# Altium PCB PC110-itx.PcbDoc (part 8 of 16)
Units mm, origin at the board's own origin, x right, y up, seen from the top; angles counter-clockwise.
Board outline 170 x 170 mm, 16 copper layers (FC1, FC2, FC3, FC4, IP1, IC1, IC2, IP2, IP3, IC3, IC4, IP4, BC4, BC3, BC2, BC1), stack 3.903 mm thick; 935 components, 1357 nets, 4698 pads, 3240 vias.
Unrouted connection lines stored in the file: 552.
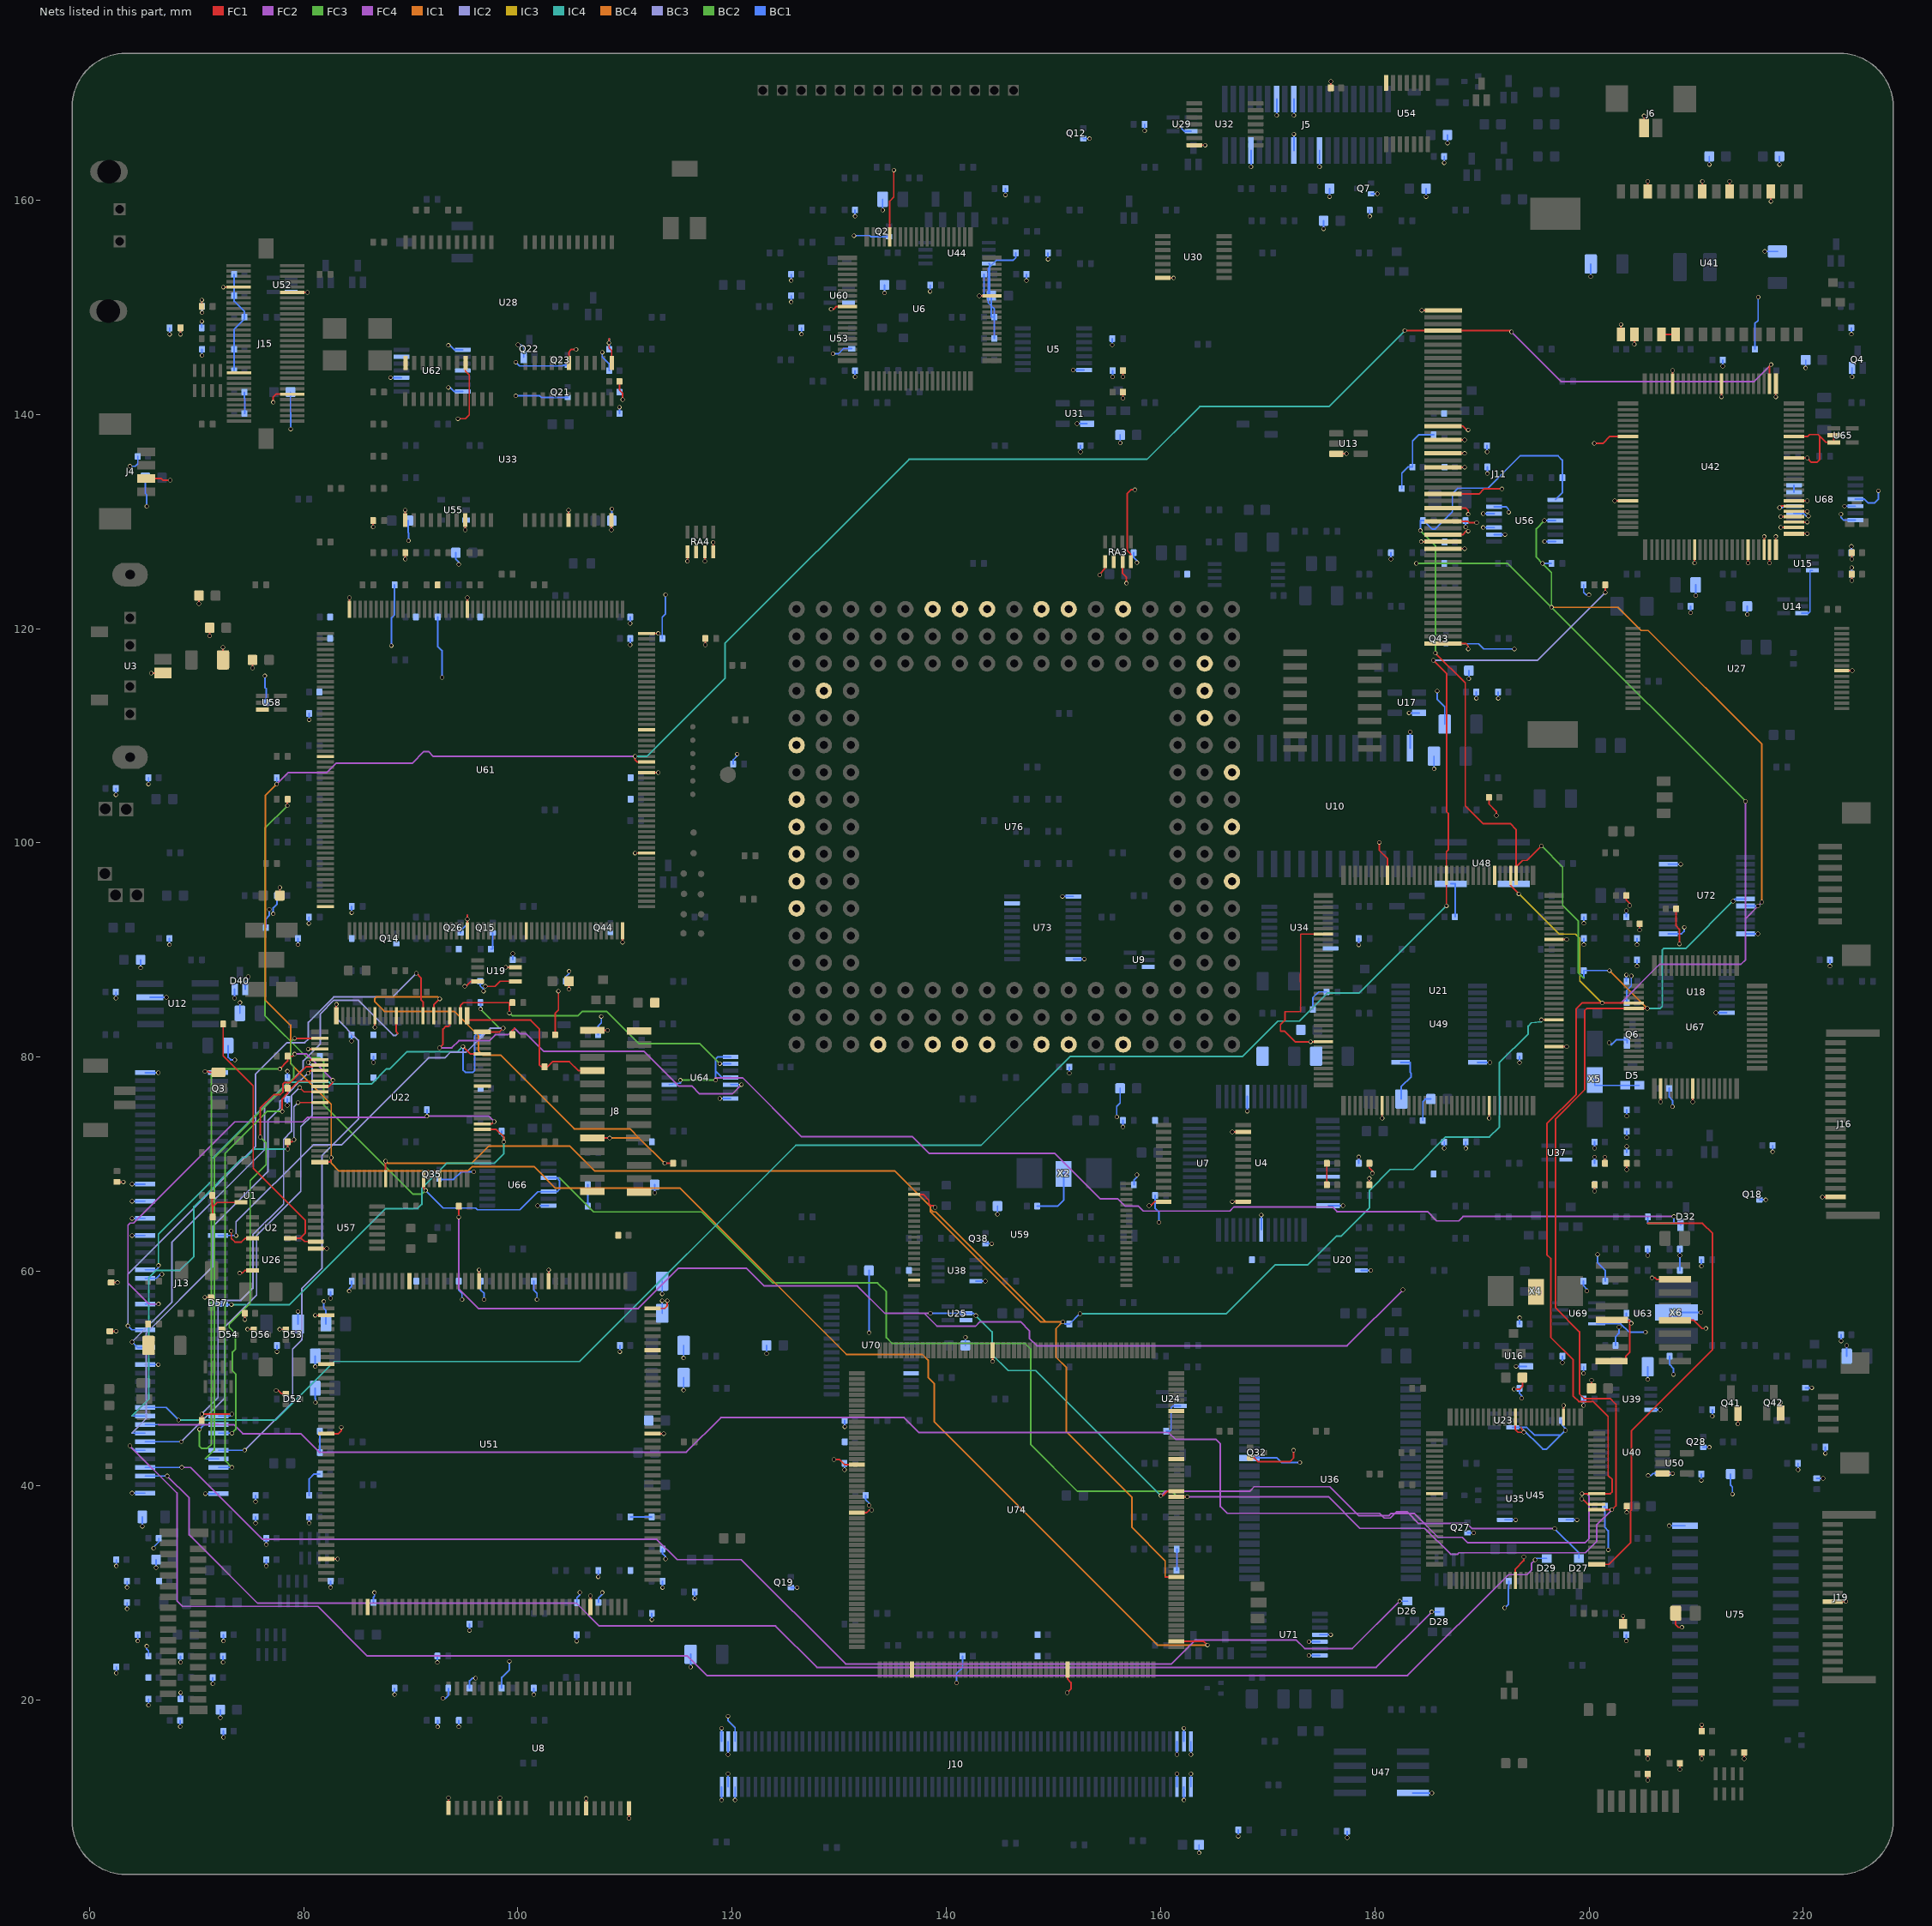
[diagram p21: the nets of this part, all layers, seen from the top]

## Via types
v1: diameter 0.4, hole 0.3, FC1 to BC1, 3240 vias

## Nets (pads, with @x,y where several pads share a name; then routed paths per layer and width w, separated by ;. In a path a pad name is that pad's centre, name@x,y a point inside that pad or via, vN(x,y) a via of type N, cw(c..) or ccw(c..) an arc to the next point about the centre after c; other vN are vias at no path point) (continued)
FDC_PE: J13.78 R138.1 U22.58 | length 50.7
  FC1 w0.15: U22.58@96.7,73.76 97.56,73.76 v1(97.79,73.99)
  FC2 w0.15: v1@91.417,74.397 v1(91.51,74.49) 97.29,74.49 v1(97.79,73.99)
  FC4 w0.15: v1(66.446,56.952) 65.577,56.952 63.602,58.928 63.602,64.313 63.805,64.516 64.11,64.516 73.558,73.965 79.934,73.965 80.366,74.397 v1@91.417,74.397
  BC1 w0.15: J13.78@65.207,56.952 v1(66.446,56.952) ; v1(91.51,74.49) R138.1@91.51,75.09
FDC_RDATA#: J13.91 R307.2 U22.14 | length 42.4
  FC1 w0.15: v1(78.51,71.425) R307.2@78.51,72.09 78.892,72.09 v1(79.095,72.293) ; v1(79.477,75.76) U22.14@81.5,75.76
  IC4 w0.15: 63.967,46.503 63.962,46.507 65.532,48.077 65.532,59.385 66.243,60.096 68.453,60.096 69.748,61.392 69.748,66.045 74.341,70.637 74.625,70.637 75.413,71.425 v1(78.51,71.425)
  BC3 w0.15: v1(79.095,72.293) 79.095,75.378 v1(79.477,75.76)
  BC1 w0.15: 63.967,46.503 J13.91@65.207,46.503
FDC_RI1#: J8.5 R190.1 U22.82 | length 47.7
  FC1 w0.15: U22.82@92.15,83.86 92.15,84.886 v1(92.71,85.446) ; J8.5@106.95,72.45 v1(108.576,72.45) ; v1(113.716,70.09) R190.1@114.49,70.09
  BC4 w0.15: v1(92.71,85.446) 92.532,85.623 86.766,85.623 86.64,85.497 86.64,85.166 87.528,84.277 94.068,84.277 96.317,82.028 96.317,80.594 96.723,80.188 98.374,80.188 105.258,73.304 110.479,73.304 111.333,72.45 ; v1(108.576,72.45) 111.333,72.45 ; v1(113.716,70.09) 113.704,70.079 111.333,72.45
FDC_RI2#: J13.81 R311.1 U22.84 | length 54.3
  FC1 w0.15: v1(90.526,87.833) 90.958,87.401 90.958,85.358 91.15,85.166 U22.84@91.15,83.86
  BC3 w0.15: v1(63.602,54.915) 63.602,59.766 75.514,71.679 75.514,78.435 78.435,81.356 80.112,81.356 80.442,81.686 80.442,83.261 82.804,85.623 88.316,85.623 v1(90.526,87.833)
  BC1 w0.15: v1(63.602,54.915) 63.964,54.552 J13.81@65.207,54.552
FDC_RTS1#: R193.1 U22.79 U64.5 | length 37.1
  FC1 w0.15: v1(92.685,80.874) 93.015,81.204 93.015,82.626 93.269,82.88 93.523,82.88 93.65,83.007 U22.79@93.65,83.86 ; R193.1@99.49,82.09 99.49,82.497 99.688,82.695
  FC2 w0.15: v1(92.685,80.874) 93.832,80.874 94.493,81.534 97.333,81.534 97.892,82.093 99.085,82.093 99.688,82.695 100.189,82.194 100.762,82.194 102.413,80.543 111.785,80.543 115.011,77.318 116.23,77.318 116.967,76.581 120.02,76.581 v1(120.879,77.44)
  BC1 w0.15: U64.5@119.862,77.44 v1(120.879,77.44)
FDC_RTS2#: J13.83 U22.89 | length 50.2
  FC1 w0.15: U22.89@88.65,83.86 88.65,82.368 88.773,82.245 88.773,82.194
  BC3 w0.15: v1(63.983,53.411) 67.691,57.119 67.691,62.71 76.352,71.371 76.352,75.336 79.959,78.943 79.959,79.654 81.559,81.255 81.559,84.049 82.829,85.319 85.09,85.319 88.367,82.042 88.621,82.042 88.773,82.194
  BC1 w0.15: v1(63.983,53.411) 64.491,52.903 J13.83@65.207,52.903
FDC_RXD1: J8.10 R194.1 U22.76 | length 16.4
  FC1 w0.15: U22.76@95.25,83.86 95.25,83.464 101.194,83.464 102.006,82.652 102.006,79.293 102.21,79.09 R194.1@102.49,79.09 102.737,79.09 103.226,79.578 104.81,79.578 105.639,78.75 J8.10@106.95,78.75
FDC_SLCT: J13.23 R140.2 U22.57 | length 38.3
  FC1 w0.15: U22.57@96.7,73.26 97.976,73.26 98.693,72.542 v1(98.693,72.084)
  IC4 w0.15: v1(73.254,56.903) 78.696,56.903 87.655,65.862 90.627,65.862 91.034,66.269 91.034,67.742 93.396,70.104 97.815,70.104 98.693,70.982 v1(98.693,72.084)
  BC1 w0.15: J13.23@72.008,56.903 v1(73.254,56.903) ; R140.2@98.49,73.09 98.49,72.693 98.693,72.49 v1(98.693,72.084)
FDC_SLCTIN#: J13.74 R132.1 U22.71 | length 50.9
  FC1 w0.15: v1(94.869,81.001) 95.56,80.31 U22.71@96.7,80.31
  IC4 w0.15: v1(66.446,60.554) 66.446,63.477 71.409,68.44 71.409,70.495 78.588,77.673 82.373,77.673 82.55,77.496 86.335,77.496 87.756,78.917 88.063,78.917 89.639,80.493 94.361,80.493 v1(94.869,81.001)
  BC1 w0.15: J13.74@65.207,60.152 66.243,60.152 66.446,60.356 v1(66.446,60.554) ; v1(94.869,81.001) 94.869,78.816 95.098,78.588 95.809,78.588 95.961,78.74 95.961,81.988 96.063,82.09 R132.1@96.51,82.09
FDC_STEP#: J13.94 U22.6 | length 45.2
  FC1 w0.15: v1(80.416,79.502) 80.674,79.76 U22.6@81.5,79.76
  BC3 w0.15: v1(68.58,44.102) 72.619,48.141 72.619,54.795 75.616,57.792 75.616,63.354 79.731,67.469 79.731,73.508 80.797,74.574 80.797,79.121 v1(80.416,79.502)
  BC1 w0.15: J13.94@65.207,44.102 v1(68.58,44.102)
FDC_STROBE#: J13.31 R137.1 U22.75 | length 40.9
  FC1 w0.15: U22.75@96.7,82.36 98.286,82.36 v1(98.628,82.702)
  IC2 w0.15: v1(73.69,63.352) 73.69,64.618 80.891,71.818 83.553,71.818 91.669,79.934 93.167,79.934 93.701,80.467 95.174,80.467 97.409,82.702 v1(98.628,82.702)
  BC2 w0.15: v1(96.51,84.49) 98.298,82.702 v1(98.628,82.702)
  BC1 w0.15: J13.31@72.008,63.352 v1(73.69,63.352) ; v1(96.51,84.49) R137.1@96.51,85.09
FDC_TRK0#: J13.9 R124.2 U22.11 | length 54.4
  FC1 w0.15: v1(77.775,78.892) 78.51,79.628 R124.2@78.51,80.09 78.969,80.09 v1(79.172,80.293) ; U22.11@81.5,77.26 82.34,77.26 82.728,77.648 v1(82.728,77.851)
  FC2 w0.15: v1(79.172,80.293) 80.286,80.293 v1(82.728,77.851)
  FC3 w0.15: v1(70.282,45.263) 70.282,43.663 70.46,43.485 71.018,43.485 71.399,43.866 71.399,78.334 71.958,78.892 v1(77.775,78.892)
  BC1 w0.15: v1(70.282,45.263) 70.722,45.703 J13.9@72.058,45.703
FDC_TXD1: R188.1 U22.77 U64.2 | length 29.8
  FC1 w0.15: U22.77@94.65,83.86 94.65,84.846 94.894,85.09 99.212,85.09 ; v1(99.212,84.125) 99.212,85.09 ; R188.1@99.49,85.09 99.212,85.09
  BC2 w0.15: v1(99.212,84.125) 99.466,83.871 105.613,83.871 106.02,84.277 108.28,84.277 111.303,81.255 116.992,81.255 v1(118.847,79.4)
  BC1 w0.15: v1(118.847,79.4) 118.847,79.39 U64.2@119.862,79.39
FDC_TXD2_EN: R8.1 U2.5 U57.6 | length 25.9
  FC1 w0.15: R8.1@72.49,83.09 72.49,80.113 75.286,77.318 75.286,69.647 80.162,64.77 80.162,63.598 79.654,63.09 ; U2.5@78.75,63.09 79.654,63.09 ; U57.6@81.138,62.79 80.081,62.79 79.781,63.09 79.654,63.09
FDC_UART1_EN: D32.1 R180.2 U35.76 U64.1 U64.4 U64.10 | length 152.3
  FC1 w0.15: U35.76@200.72,32.65 201.849,32.65 203.87,34.671 203.87,37.409 203.875,37.414 203.875,37.632 203.962,37.719 203.962,45.136 211.531,52.705 211.531,63.551 210.591,64.491 205.49,64.491
  FC2 w0.15: v1(118.466,77.851) 118.466,78.08 120.98,78.08 126.492,72.568 136.855,72.568 138.405,71.018 150.139,71.018 154.383,66.775 156.008,66.775 156.692,66.091 157.937,66.091 158.394,65.634 166.454,65.634 166.851,66.031 176.022,66.031 176.472,65.582 184.913,65.582 185.775,64.72 187.832,64.72 188.238,65.126 v1(207.915,65.126)
  BC2 w0.15: v1(115.164,77.851) v1(118.466,77.851)
  BC1 w0.15: U64.10@114.137,77.44 115.164,77.592 v1(115.164,77.851) ; v1(118.466,77.851) 118.466,78.7 ; U64.4@119.862,78.09 119.075,78.09 118.466,78.7 ; U64.1@119.862,80.04 118.669,80.04 118.466,79.837 118.466,78.7 ; R180.2@205.49,65.09 205.49,64.491 207.915,64.491 ; v1(207.915,65.126) 207.915,64.491 ; D32.1@208.55,64.34 208.55,64.491 207.915,64.491
FDC_WDATA#: J13.8 U22.7 | length 41.6
  FC1 w0.15: v1(75.946,72.542) 75.946,75.235 77.216,76.505 77.826,76.505 78.08,76.759 78.08,77.521 78.181,77.622 78.74,77.622 80.213,79.096 80.848,79.096 80.848,79.26 U22.7@81.5,79.26
  FC3 w0.15: v1(73.304,44.902) 73.66,45.258 73.66,50.419 73.356,50.723 73.356,52.477 73.635,52.756 73.635,54.204 73.05,54.788 73.05,55.068 75.006,57.024 75.006,68.478 76.493,69.965 76.493,71.995 v1(75.946,72.542)
  BC1 w0.15: J13.8@72.058,44.902 v1(73.304,44.902)
FDC_WGATE#: J13.93 U22.8 | length 42.9
  FC1 w0.15: v1(80.416,78.511) 80.665,78.76 U22.8@81.5,78.76
  BC3 w0.15: 63.967,44.902 63.962,44.907 65.303,46.249 65.303,54.229 71.501,60.427 71.501,64.16 76.657,69.317 76.657,74.092 77.798,75.233 77.798,75.893 v1(80.416,78.511)
  BC1 w0.15: 63.967,44.902 J13.93@65.207,44.902
FDC_WRTPRT#: J13.10 R125.1 U22.12 | length 42.6
  FC1 w0.15: v1(70.49,46.69) R125.1@70.49,46.09 70.495,46.685 v1(73.304,46.685) ; v1(79.628,77.166) 80.035,76.76 U22.12@81.5,76.76
  BC3 w0.15: v1@70.495,46.685 v1(70.49,46.69) 72.009,48.209 72.009,56.896 72.415,57.302 74.143,57.302 75.26,58.42 75.26,63.424 78.13,66.294 78.13,72.335 78.865,73.07 78.865,76.403 v1(79.628,77.166)
  BC1 w0.15: J13.10@72.058,46.503 73.122,46.503 v1(73.304,46.685)
FDD_Bowman: J13.90 R144.2 U21.125 | length 184.8
  FC1 w0.15: v1(185.471,117.043) 186.69,115.824 186.69,102.921 186.868,102.743 186.868,99.373 186.682,99.187 U21.125@186.682,96.966 186.682,94.14 v1(186.69,94.132) ; R144.2@201.51,124.09 201.51,123.407 v1(201.524,123.393)
  IC2 w0.15: v1(185.471,117.043) 195.174,117.043 v1(201.524,123.393)
  IC4 w0.15: v1(68.326,46.126) 77.394,46.126 82.855,51.587 105.766,51.587 125.959,71.78 143.256,71.78 151.536,80.061 167.64,80.061 170.943,83.364 172.949,83.364 175.565,85.979 178.537,85.979 v1(186.69,94.132)
  BC1 w0.15: J13.90@65.207,47.303 67.15,47.303 v1(68.326,46.126)
FDD_DRSEL: J13.5 U22.2 | length 46.5
  FC1 w0.15: v1(79.146,81.76) U22.2@81.5,81.76
  FC3 w0.15: 70.823,42.502 71.653,43.332 71.653,70.612 79.07,78.029 79.07,79.146 78.816,79.4 78.816,81.43 v1(79.146,81.76)
  BC1 w0.15: 70.823,42.502 J13.5@72.058,42.502
FDD_INDEX#: J13.4 R123.2 U22.10 | length 43.4
  FC1 w0.15: v1(78.003,74.93) 78.003,76.124 78.51,76.63 R123.2@78.51,77.09 78.847,77.09 79.517,77.76 U22.10@81.5,77.76
  FC3 w0.15: v1(73.304,41.702) 72.68,42.327 72.68,71.029 76.581,74.93 v1(78.003,74.93)
  BC1 w0.15: J13.4@72.058,41.702 v1(73.304,41.702)
FDD_MOTEN: J13.6 U22.100 | length 50.4
  FC1 w0.15: U22.100@83.05,83.86 83.05,84.93 v1(83.058,84.938)
  BC3 w0.15: v1(74.498,43.302) 78.969,47.773 78.969,52.73 79.832,53.594 79.832,58.395 81.712,60.275 81.712,70.816 85.115,74.219 85.115,81.585 83.058,83.642 v1(83.058,84.938)
  BC1 w0.15: J13.6@72.058,43.302 v1(74.498,43.302)
FDD_Pluto1: D28.2 J13.98 | length 132.4
  FC4 w0.15: v1(67.259,40.902) 69.317,38.845 69.317,35.408 75.692,29.032 105.461,29.032 107.594,26.899 124.054,26.899 127.914,23.038 180.137,23.038 v1(185.314,28.215)
  BC1 w0.15: J13.98@65.207,40.902 v1(67.259,40.902) ; v1(185.314,28.215) D28.2@186.05,28.215
FDD_Pluto2: D26.2 J13.97 | length 128.5
  FC4 w0.15: v1(68.631,41.702) 69.452,41.702 76.161,34.994 112.961,34.994 114.859,33.096 120.853,33.096 130.598,23.351 161.017,23.351 163.27,25.603 172.644,25.603 173.457,24.79 177.897,24.79 v1(182.321,29.215)
  BC1 w0.15: J13.97@65.207,41.702 v1(68.631,41.702) ; v1(182.321,29.215) D26.2@183.05,29.215
FDD_Pluto3: D29.2 J13.95 | length 153.6
  FC4 w0.15: v1(63.779,43.713) 68.174,39.319 68.174,29.235 68.682,28.727 81.331,28.727 85.954,24.105 115.824,24.105 117.656,22.273 183.055,22.273 192.481,31.699 194.208,31.699 194.615,32.106 194.615,32.723 v1(194.962,33.071)
  BC1 w0.15: v1(63.779,43.713) 64.19,43.302 J13.95@65.207,43.302 ; v1(194.962,33.071) 195.106,33.215 D29.2@196.05,33.215
FDD_Pluto4: D27.2 J13.92 | length 145.9
  FC4 w0.15: 66.438,45.703 66.446,45.695 73.482,45.695 74.32,44.856 79.721,44.856 81.449,43.129 115.722,43.129 118.948,46.355 136.068,46.355 137.465,44.958 160.766,44.958 161.391,44.333 165.141,44.333 165.583,43.891 165.583,38.049 166.218,37.414 180.442,37.414 180.874,36.982 181.431,36.982 181.996,37.548 183.025,37.548 184.099,36.474 188.595,36.474 189.078,35.992 v1(196.789,35.992)
  BC1 w0.15: J13.92@65.207,45.703 66.438,45.703 ; v1(196.789,35.992) 199.05,33.731 D27.2@199.05,33.215
GND: C1.1 C2.2 C3.2 C4.2 C5.2 C6.1 C7.2 C8.2 C9.2 C14.2 C16.2 C17.2 C19.1 C20.1 C22.2 C24.1 C26.2 C27.2 C28.2 C30.1 C31.1 C32.2 C33.2 C34.2 C35.1 C36.1 C37.2 C38.2 C39.2 C40.2 C41.2 C42.1 C43.2 C44.1 C45.2 C47.2 C48.2 C49.1 C50.1 C51.2 C52.2 C53.1 C54.2 C55.1 C56.2 C57.1 C58.1 C59.2 C61.2 C62.1 C63.1 C64.1 C66.1 C68.2 C69.2 C70.1 C71.1 C72.2 C73.1 C74.1 C75.2 C76.2 C77.1 C78.1 C79.2 C80.2 C81.2 C82.2 C83.2 C84.2 C86.2 C87.2 C88.1 C90.1 C91.2 C92.1 C93.2 C94.2 C95.2 C96.1 C97.2 C98.2 C99.1 C100.2 C101.1 C102.1 C103.2 C104.1 C105.2 C106.1 C107.1 C108.1 C109.1 C110.1 C111.2 C112.1 C113.1 C114.1 C115.1 C116.2 C117.1 C118.2 C119.2 C120.2 C121.2 C122.2 C123.2 C124.1 C125.1 C126.2 C127.1 C128.2 C129.2 C131.2 C132.2 C133.2 C134.1 C135.2 C136.2 C139.1 C144.1 C145.1 C148.1 C149.1 C151.2 C152.2 C153.2 C155.1 C156.1 C158.1 C159.1 C160.1 C161.2 C162.2 C163.1 C164.1 C165.2 C166.2 C167.1 C168.1 C169.2 C170.2 C171.2 C172.1 C173.2 C174.2 C175.2 C176.2 C177.1 C178.2 C179.2 C180.2 C181.2 C182.2 C183.2 C184.2 C185.2 C186.2 C187.2 C188.2 C189.1 C190.2 C191.2 C192.2 C193.2 C194.2 C195.1 C196.2 C197.1 C198.2 C199.2 C200.1 C201.2 C202.1 C203.1 C204.1 C205.2 C206.1 C208.1 C210.1 C211.1 C212.2 C215.2 C216.2 C217.2 C218.2 C219.2 C220.1 C221.1 C222.1 C223.1 C224.1 C226.1 C227.1 C228.2 C229.1 C230.1 C231.1 C232.1 C233.2 C234.1 C235.2 C236.2 C237.2 C239.1 C241.1 C242.1 C243.2 C244.1 C245.1 C246.2 C247.2 C249.1 C250.1 C251.1 C252.2 C253.2 C254.1 C255.1 C256.1 C258.1 C259.1 C260.1 C261.2 C262.1 C263.1 C264.1 C265.1 C267.1 C268.1 C269.1 C271.2 C272.2 C273.2 C274.2 C275.2 C276.2 C277.1 C278.1 C279.2 C280.1 C281.1 C282.2 C283.2 D5.1 D5.3 D23.2 D36.2 D40.1 D40.2 D41.2 D47.2 D52.1 D53.1 D54.1 D56.1 D57.1 J4.2 J5.7 J5.9 J5.24 J5.29 J5.32 J6.2 J8.1 J8.13 J8.14 J8.26 J10.1 J10.2 J10.3 J10.68 J10.69 J10.70 J10.71 J10.72 J10.73 J10.138 J10.139 J10.140 J11.1 J11.15 J11.16 J11.17 J11.19 J11.21 J11.23 J11.27 J11.29 J11.31 J11.33 J11.50 J13.1 J13.50 J13.51 J13.64 J13.66 J13.68 J13.70 J13.75 J13.85 J13.100 J15.10 J15.26 J15.36 J15.55 J16.2 J19.9 L2.1 L10.2 Q2.2 Q3.1 Q4.1 Q6.1 Q7.2 Q12.2 Q14.2 Q15.2 Q18.2 Q19.2 Q21.2 Q22.1 Q23.2 Q26.2 Q27.2 Q28.2 Q32.2 Q35.2 Q38.2 Q41.1 Q42.1 Q43.2 Q44.2 R1.1 R2.1 R5.1 R6.1 R7.1 R10.1 R11.2 R13.1 R15.2 R18.2 R19.1 R22.1 R23.2 R29.2 R33.2 R49.2 R57.2 R60.1 R61.1 R63.1 R66.1 R73.1 R77.2 R80.1 R82.2 R83.2 R90.1 R91.2 R98.2 R108.2 R113.1 R126.2 R131.1 R145.1 R147.2 R150.2 R151.1 R153.1 R155.1 R160.1 R184.2 R186.2 R199.1 R202.1 R209.2 R210.2 R211.2 R213.2 R218.1 R219.1 R223.2 R224.2 R230.1 R231.1 R233.2 R247.2 R259.2 R263.2 R264.2 R265.2 R267.2 R269.2 R270.2 R271.1 R273.2 R275.2 R279.2 R280.2 R314.2 R327.2 R379.1 R383.1 R395.1 R402.2 R404.2 R405.2 R406.2 R408.1 R411.1 RA3.5 RA3.6 RA3.7 RA3.8 RA4.5 RA4.6 RA4.7 RA4.8 U1.3 U2.4 U3.2 U4.5 U4.22 U4.26 U4.33 U5.7 U6.16 U6.30 U6.73 U7.12 U7.13 U7.23 U8.21 U8.27 U8.35 U8.40 U9.3 U10.12 U12.7 U13.3 U14.3 U15.3 U16.3 U17.3 U18.7 U19.4 U19.5 U19.7 U20.4 U21.8 U21.28 U21.44 U21.64 U21.80 U21.100 U21.116 U21.136 U22.4 U22.45 U22.65 U22.93 U23.3 U24.3 U25.3 U26.4 U27.24 U28.23 U28.30 U28.39 U28.44 U29.3 U30.7 U31.3 U32.7 U33.23 U33.30 U33.39 U33.44 U34.7 U35.4 U35.13 U35.37 U35.63 U35.87 U36.15 U37.3 U38.4 U39.4 U40.7 U41.3 U41.6 U41.8 U41.12 U41.15 U41.16 U41.18 U41.19 U42.10 U42.20 U42.23 U42.24 U42.25 U42.26 U42.27 U42.28 U42.29 U42.30 U42.31 U42.32 U42.40 U42.44 U42.51 U42.61 U42.70 U42.82 U42.94 U44.4 U45.8 U45.9 U47.4 U48.4 U48.5 U49.12 U49.13 U50.3 U51.12 U51.22 U51.32 U51.42 U51.49 U51.59 U51.77 U51.83 U51.115 U51.142 U51.154 U51.160 U52.3 U53.3 U54.7 U55.3 U56.7 U56.9 U56.10 U56.12 U56.13 U57.7 U58.3 U59.23 U59.39 U60.3 U61.11 U61.26 U61.34 U61.52 U61.82 U61.104 U61.128 U61.156 U61.179 U61.190 U61.208 U62.1 U62.4 U62.7 U62.10 U62.13 U63.5 U63.8 U63.12 U63.15 U64.7 U65.2 U65.3 U66.7 U67.18 U67.24 U68.4 U68.5 U68.7 U68.9 U68.10 U68.12 U68.13 U69.4 U70.12 U71.4 U71.5 U71.7 U72.12 U72.13 U72.23 U73.1 U73.10 U73.19 U74.31 U74.70 U74.79 U74.111 U74.140 U74.192 U74.201 U75.14 U76.A7 U76.A9 U76.A11 U76.B3 U76.B4 U76.B5 U76.E1 U76.E17 U76.G1 U76.G17 U76.H1 U76.H17 U76.K1 U76.K17 U76.L1 U76.L17 U76.M1 U76.M17 U76.P17 U76.R4 U76.S6 U76.S8 U76.S9 U76.S10 U76.S11 U76.S12 X2.3 X4.3 X5.3 X6.3 | length 734.2
  FC1 w0.15: C93.2@61.91,54.42 v1(62.5,54.42) ; C239.1@62.03,58.96 v1(62.62,58.96) ; R60.1@62.57,68.35 v1(63.17,68.35) ; J4.2@65.3,134.02 66.727,134.02 66.889,133.858 v1(67.553,133.858) ; v1(65.77,115.855) U3.2@66.85,115.855 ; v1(68.51,147.49) R406.2@68.51,148.09 ; v1(70.225,122.335) C197.1@70.225,123.09 ; R151.1@70.49,150.09 v1(70.49,150.69) ; v1(70.77,57.59) D57.1@71.35,57.59 ; v1(70.785,78.665) 71.098,78.665 71.173,78.59 Q3.1@72.05,78.59 ; v1(71.225,119.335) C168.1@71.225,120.09 ; C4.2@71.48,67.09 71.48,66.112 71.52,66.072 71.52,66.027 ; C1.1@71.52,65.09 71.52,66.027 ; C201.2@72.475,117.09 v1(72.475,118.27) ; v1(72.497,151.893) J15.26@73.928,151.893 ; v1(73.247,63.779) 73.247,63.09 73.602,62.735 74.182,62.735 74.537,63.09 U2.4@75.25,63.09 ; v1(74.035,59.842) 74.262,59.842 74.51,60.09 U26.4@75.25,60.09 ; U1.3@74.15,66.44 71.933,66.44 71.52,66.027 ; v1(74.52,55.5) C92.1@74.52,56.09 ; v1(74.77,54.59) D56.1@75.35,54.59 ; v1(75.225,116.335) C202.1@75.225,117.09 ; v1(77.162,141.131) 77.162,141.641 77.413,141.892 J15.55@78.928,141.892 ; v1(77.435,48.877) 77.642,48.877 77.93,48.59 D52.1@78.35,48.59 ; v1(77.77,54.59) D53.1@78.35,54.59 ; C79.2@77.775,95.09 v1(77.775,95.845) ; J15.36@78.928,151.392 v1(80.358,151.392) ; v1(80.42,80.76) U22.4@81.5,80.76 ; v1(81.085,55.905) U51.42@82.13,55.905 ; U57.7@81.138,62.14 v1(82.155,62.14) ; U51.77@82.13,33.155 v1(83.175,33.155) ; U51.59@82.13,44.855 83.259,44.855 83.51,45.106 v1(83.51,45.455) ; U61.104@84.278,121.807 v1(84.278,122.887) ; v1(86.49,129.49) R155.1@86.49,130.09 ; v1(86.65,82.78) U22.93@86.65,83.86 ; U33.23@89.488,130.148 v1(89.488,131.078) ; v1(89.49,126.49) R153.1@89.49,127.09 ; U8.21@93.531,9.921 v1(93.531,10.851) ; v1(94.408,139.605) 95.108,139.605 95.463,139.96 95.463,143.689 95.108,144.044 U28.30@95.108,144.807 ; v1(95.035,86.614) 95.148,86.614 95.624,87.09 U19.4@96.25,87.09 ; v1(95.087,129.217) U33.30@95.087,130.148 ; U61.179@95.278,91.807 95.278,93.293 ; U61.82@95.278,121.807 v1(95.278,122.887) ; U51.22@96.375,59.1 v1(96.375,60.145) ; v1(96.96,86.614) 97.86,86.614 98.336,87.09 U19.5@99.75,87.09 ; U8.27@98.331,9.921 v1(98.331,10.851) ; v1(98.87,88.39) U19.7@99.75,88.39 ; U51.12@102.875,59.1 v1(102.875,60.145) ; C86.2@103.48,82.09 103.48,84.085 103.787,84.393 v1(103.787,86.165) ; U33.39@104.738,130.148 v1(104.738,131.078) ; U28.39@104.758,144.807 104.758,145.822 105.009,146.073 v1(105.432,146.073) ; v1(104.775,86.335) C80.2@104.775,87.09 ; U8.35@106.381,9.871 v1(106.381,10.801) ; U51.115@106.775,28.66 v1(106.775,29.705) ; J8.13@106.95,82.5 v1(108.373,82.5) ; 108.52,147.086 v1(108.509,146.685) 108.509,146.223 108.758,145.974 U28.44@108.758,144.807 ; v1(108.738,129.217) U33.44@108.738,130.148 ; C95.2@109.48,143.09 109.48,142.276 109.787,141.968 v1(109.787,141.377) ; v1(109.778,90.727) U61.208@109.778,91.807 ; v1(110.381,8.941) U8.40@110.381,9.871 ; v1(110.948,99.057) U61.11@112.028,99.057 ; U61.26@112.028,106.557 v1(113.108,106.557) ; U61.52@112.028,119.557 v1(113.108,119.557) ; U51.142@112.57,44.855 v1(113.615,44.855) ; U51.160@112.57,56.555 113.699,56.555 113.95,56.806 v1(113.95,57.266) ; v1(115.837,126.302) RA4.5@115.837,127.182 ; RA4.6@116.637,127.182 v1(116.637,128.062) ; v1(117.462,126.302) RA4.7@117.462,127.182 ; v1(117.49,118.49) R395.1@117.49,119.09 ; RA4.8@118.237,127.182 v1(118.237,128.062) ; v1(129.245,149.827) 129.472,149.827 129.72,150.075 U6.30@130.76,150.075 ; v1(129.505,42.443) 130.013,42.443 130.487,41.969 U74.70@131.658,41.969 ; U74.79@131.658,37.469 132.547,37.469 132.797,37.719 v1(133.023,37.719) ; U6.16@134.71,156.575 134.71,159.911 135.09,160.292 v1(135.09,162.815) ; U59.23@137,67.19 137.835,67.19 138.375,66.65 138.375,66.333 138.582,66.125 138.807,66.125 v1(138.953,65.98) ; v1(143.08,151.075) U6.73@144.26,151.075 ; v1(144.308,51.589) U74.31@144.308,52.619 ; v1(151.282,20.666) 151.637,21.021 151.637,21.626 151.308,21.956 U74.140@151.308,22.819 ; v1(154.33,125.025) 154.33,125.128 154.825,125.623 RA3.5@154.825,126.24 ; RA3.6@155.625,126.24 v1(155.625,127.12) ; RA3.7@156.45,126.24 156.45,125.166 156.819,124.798 v1(156.819,124.237) ; v1(156.48,141.5) C235.2@156.48,142.09 ; v1(156.48,143.5) C3.2@156.48,144.09 ; RA3.8@157.225,126.24 157.225,126.953 156.87,127.308 156.87,132.612 157.225,132.967 v1(157.606,132.967) ; v1(158.935,66.142) 159.099,66.142 159.473,66.515 U7.12@160.288,66.515 ; U30.7@160.206,152.736 v1(161.223,152.736) ; U32.7@163.137,165.14 v1(164.155,165.14) ; v1(166.695,66.515) U7.13@167.712,66.515 ; v1(166.695,73.015) U7.23@167.712,73.015 ; Q32.2@168.35,42.59 168.763,42.59 169.118,42.235 172.06,42.235 172.415,42.59 v1(172.415,43.307) ; U21.28@175.182,81.441 v1(174.002,81.441) 172.559,81.441 171.577,82.423 171.197,82.423 171.197,83.033 171.602,83.439 171.602,84.252 173.076,84.252 173.076,87.021 173.051,87.046 173.051,87.732 173.076,87.757 173.076,91.491 U21.8@175.209,91.491 ; C265.1@175.52,68.09 C90.1@175.52,70.09 ; C228.2@175.89,170.49 v1(175.89,171.08) ; U13.3@176.408,136.337 v1(177.351,136.337) ; C243.2@179.48,68.09 v1(179.48,68.68) ; C91.2@179.48,70.09 179.48,69.669 179.787,69.362 v1(179.787,69.165) ; v1(180.42,100.056) 180.42,99.299 181.182,98.537 U21.136@181.182,96.966 ; v1(180.682,74.311) U21.44@180.682,75.491 ; v1(184.327,128.122) J11.16@186.358,128.122 ; v1(184.377,149.722) J11.50@186.408,149.722 ; J11.1@186.358,118.623 188.472,118.623 188.723,118.371 v1(188.723,118.11) ; J11.15@186.358,127.472 v1(188.388,127.472) ; J11.17@186.358,128.773 188.203,128.773 188.541,129.11 v1(188.723,129.11) ; J11.19@186.358,130.022 188.703,130.022 188.828,129.898 v1(189.51,129.898) ; J11.21@186.358,131.272 188.472,131.272 188.723,131.021 v1(188.723,130.685) ; J11.23@186.358,132.573 189.709,132.573 190.184,133.047 v1(191.872,133.047) ; J11.27@186.358,135.073 v1(188.388,135.073) ; J11.29@186.358,136.372 v1(188.388,136.372) ; J11.31@186.358,137.622 v1(188.388,137.622) ; J11.33@186.358,138.923 188.19,138.923 188.553,138.559 v1(188.723,138.559) ; C107.1@190.655,104.267 190.655,103.641 191.338,102.958 v1(191.338,102.554) ; v1(190.682,74.311) U21.64@190.682,75.491 ; v1(193,49) 193.524,49 193.775,49.251 C59.2@193.775,50.09 ; U35.63@193.12,31.15 193.12,32.214 193.907,33.002 v1(193.907,33.353) ; U35.13@193.12,46.4 193.12,45.236 193.371,44.985 v1(193.907,44.985) 193.65,45.44 ; U21.80@196.732,80.991 v1(197.912,80.991) ; U21.100@196.732,90.991 v1(197.912,90.991) ; U35.4@197.62,46.4 v1(197.62,47.48) ; v1(199.305,38.75) 199.406,38.75 199.906,38.25 U35.87@200.72,38.25 ; C259.1@200.225,49.09 v1(200.225,49.845) ; v1(200.487,137.298) 201.3,137.298 201.951,137.95 U42.82@203.627,137.95 ; v1(200.52,67.5) C101.1@200.52,68.09 ; C105.2@201.48,70.09 v1(201.48,70.68) ; U63.8@202.1,51.645 203.449,51.645 203.449,52.095 203.805,52.451 203.805,55.455 U63.5@202.15,55.455 ; v1(202.397,131.95) U42.94@203.627,131.95 ; U41.15@202.975,147.475 v1(202.975,148.405) ; R231.1@203.175,27.09 v1(203.175,27.845) ; C103.2@203.48,95.09 203.48,94.669 203.787,94.362 v1(203.787,94.165) ; v1(203.52,37.5) C112.1@203.52,38.09 ; v1(203.52,69.5) C104.1@203.52,70.09 ; v1(204.225,146.545) U41.16@204.225,147.475 ; v1(204.724,91.866) C2.2@204.724,92.456 ; J6.2@205.135,166.735 v1(205.135,167.865) ; U41.12@205.475,160.825 v1(205.475,161.755) ; v1(205.48,12.5) C170.2@205.48,13.09 ; v1(205.48,14.5) C198.2@205.48,15.09 ; v1(205.885,59.398) 206.169,59.398 206.303,59.265 U63.15@208,59.265 ; v1(206.685,75.828) U67.18@206.685,77.058 ; U41.18@206.775,147.475 206.775,147.472 208.075,147.472 U41.19@208.075,147.475 ; U50.3@206.862,41.14 v1(207.805,41.14) ; U42.70@207.802,142.875 v1(207.802,144.105) ; U63.12@208,55.44 209.775,55.44 210.541,54.674 v1(210.903,54.674) ; R230.1@208.088,28.09 208.088,27.026 208.339,26.775 v1(208.661,26.775) ; C237.2@208.125,93.853 208.125,92.251 208.432,91.944 v1(208.432,90.566) ; v1(208.48,13.5) C7.2@208.48,14.09 ; v1(209.685,75.828) U67.24@209.685,77.058 ; v1(209.852,126.145) U42.10@209.852,127.375 ; v1(210.52,14.5) C167.1@210.52,15.09 ; C163.1@210.52,17.09 v1(210.52,17.68) ; U41.8@210.575,160.825 v1(210.575,161.755) ; v1(212.352,141.645) U42.61@212.352,142.875 ; U41.6@213.125,160.825 v1(213.125,161.755) ; v1(213.9,45.77) Q41.1@213.9,46.75 ; v1(214.48,14.5) C199.2@214.48,15.09 ; v1(214.852,126.145) U42.20@214.852,127.375 ; U42.23@216.352,127.375 v1(216.352,128.605) ; v1(216.852,126.145) U42.24@216.852,127.375 ; v1(216.975,159.895) U41.3@216.975,160.825 ; U42.25@217.427,127.375 v1(217.427,128.605) ; v1(217.427,141.645) U42.51@217.427,142.875 ; v1(217.78,131.293) 217.937,131.45 U42.31@219.127,131.45 ; Q42.1@217.89,46.8 v1(217.89,47.78) ; v1(217.897,129.45) U42.27@219.127,129.45 ; v1(217.897,130.45) U42.29@219.127,130.45 ; U42.26@219.127,128.875 v1(220.357,128.875) ; U42.28@219.127,129.95 v1(220.357,129.95) ; U42.30@219.127,130.95 v1(220.357,130.95) ; U42.32@219.127,131.95 v1(220.357,131.95) ; U42.40@219.127,135.95 v1@220.345,135.95 ; U42.44@219.127,137.95 220.421,137.95 220.596,138.125 221.372,138.125 221.539,137.959 ; v1(220.357,135.95) v1@220.345,135.95 ; v1(221.782,66.943) J16.2@223.012,66.943 ; J19.9@222.758,29.185 v1(223.988,29.185) ; U65.3@222.85,137.4 U65.3@222.834,137.4 ; U65.2@222.85,138.05 222.834,138.05 U65.3@222.834,137.4 ; U27.24@223.58,116.09 v1(224.56,116.09) ; v1(224.52,124.5) C102.1@224.52,125.09 ; v1(224.52,126.5) C106.1@224.52,127.09 ; v1@220.345,135.95 220.761,135.534 221.269,135.534 221.539,135.805 221.539,137.959 ; 221.539,137.959 222.098,137.4 U65.3@222.834,137.4
  BC1 w0.15: v1(62.48,85.5) C6.1@62.48,86.09 ; v1(62.48,104.5) C159.1@62.48,105.09 ; v1(62.52,22.5) C173.2@62.52,23.09 ; v1(62.52,32.5) C192.2@62.52,33.09 ; v1(63.52,28.5) C182.2@63.52,29.09 ; v1(63.52,30.5) C175.2@63.52,31.09 ; v1(63.779,135.165) 64.269,135.165 64.52,135.416 C8.2@64.52,136.09 ; v1(63.977,39.302) J13.100@65.207,39.302 ; v1(63.977,63.352) J13.70@65.207,63.352 ; v1(63.977,64.953) J13.68@65.207,64.953 ; v1(63.977,66.553) J13.66@65.207,66.553 ; v1(63.977,68.153) J13.64@65.207,68.153 ; v1(64.52,25.5) C181.2@64.52,26.09 ; v1(64.787,88.335) L2.1@64.787,89.09 ; v1(64.937,36.21) L10.2@64.937,37.09 ; J13.85@65.207,51.303 v1(66.438,51.303) ; J13.75@65.207,59.352 66.234,59.352 66.609,59.728 v1(66.773,59.728) ; J13.51@65.207,78.552 v1(66.438,78.552) ; C153.2@65.225,134.09 65.225,132.628 65.354,132.499 v1(65.354,131.425) ; v1(65.354,25.015) 65.354,24.747 65.52,24.581 C185.2@65.52,24.09 ; v1(65.52,19.5) C194.2@65.52,20.09 ; v1(65.52,105.5) C16.2@65.52,106.09 ; U12.7@65.65,85.59 v1(67.18,85.59) ; v1(66,34.165) 66,34.276 66.48,34.756 C177.1@66.48,35.09 ; v1(66.225,32.335) C176.2@66.225,33.09 ; v1(67.48,90.5) C148.1@67.48,91.09 ; v1(67.49,147.49) R402.2@67.49,148.09 ; v1(68.48,17.5) C189.1@68.48,18.09 ; C188.2@68.52,20.09 v1(68.52,20.68) ; v1(68.52,23.5) C183.2@68.52,24.09 ; R404.2@70.49,148.09 v1(70.49,148.69) ; v1(70.52,145.5) C75.2@70.52,146.09 ; v1(70.52,149.5) C69.2@70.52,150.09 ; v1(70.827,39.252) J13.1@72.058,39.252 ; v1(71.52,21.5) C193.2@71.52,22.09 ; v1(72.225,18.335) C190.2@72.225,19.09 ; v1(72.48,23.5) C195.1@72.48,24.09 ; v1(72.52,16.5) C179.2@72.52,17.09 ; v1(72.52,25.5) C184.2@72.52,26.09 ; C49.1@72.95,81.09 72.95,80.001 73.201,79.75 v1(73.575,79.75) ; C43.2@73.52,144.09 C39.2@73.52,146.09 73.52,147.967 74.48,148.927 C109.1@74.48,149.09 74.48,149.599 73.52,150.559 C122.2@73.52,151.09 C123.2@73.52,153.09 ; v1(73.55,85.51) D40.1@73.55,86.34 ; C54.2@74.05,84.09 v1(74.05,85.095) ; C280.1@74.48,140.09 74.498,140.09 74.498,141.478 74.48,141.496 C255.1@74.48,142.09 ; D40.2@74.55,86.34 74.55,87.01 74.837,87.298 v1(74.837,87.505) ; v1(75.52,36.5) C169.2@75.52,37.09 ; v1(75.52,38.5) C191.2@75.52,39.09 ; v1(76.378,115.59) 76.378,114.523 76.52,114.38 C81.2@76.52,113.09 ; C250.1@76.48,92.09 76.48,92.904 76.787,93.212 v1(76.787,93.803) ; v1(76.52,32.5) C186.2@76.52,33.09 ; v1(76.52,34.5) C174.2@76.52,35.09 ; v1(77.165,93.377) 77.165,93.945 77.52,94.299 C76.2@77.52,95.09 ; v1(77.52,52.5) C252.2@77.52,53.09 ; v1(78.48,75.5) C35.1@78.48,76.09 ; R280.2@78.49,78.09 v1(78.49,78.69) ; C164.1@78.775,142.09 78.775,140.176 78.787,140.163 v1(78.787,138.638) ; C204.1@79.475,55.09 v1(79.475,56.27) ; v1(79.48,90.5) C251.1@79.48,91.09 ; v1(80.49,92.49) R98.2@80.49,93.09 ; v1(80.52,36.5) C178.2@80.52,37.09 ; C196.2@80.52,39.09 80.52,40.64 80.97,41.09 C165.2@81.52,41.09 ; v1(80.52,111.5) C282.2@80.52,112.09 ; R267.2@81.088,49.09 81.088,48.133 81.102,48.118 v1(81.102,47.775) ; v1(81.088,51.11) R273.2@81.088,52.09 ; C41.2@81.52,43.09 C38.2@81.52,45.09 ; v1(81.89,57.193) 81.89,56.547 82.088,56.349 R264.2@82.088,55.09 ; v1(82.51,57.49) R66.1@82.51,58.09 ; v1(82.52,30.5) C180.2@82.52,31.09 ; v1(84.252,58.155) 84.252,58.387 84.49,58.625 R263.2@84.49,59.09 ; v1(84.48,81.5) C244.1@84.48,82.09 ; v1(84.49,93.49) R49.2@84.49,94.09 ; C32.2@86.52,29.09 86.52,29.617 86.614,29.711 v1(86.614,30.015) ; v1(86.52,79.5) C84.2@86.52,80.09 ; v1(88.12,143.44) U62.10@89.137,143.44 ; v1(88.189,118.43) 88.189,120.993 88.49,121.294 R405.2@88.49,124.09 ; v1(88.49,20.49) R233.2@88.49,21.09 ; C224.1@89.775,130.09 89.775,128.963 89.787,128.951 v1(89.787,128.212) ; v1(92.49,23.49) R18.2@92.49,24.09 ; v1(92.51,17.49) R22.1@92.51,18.09 ; C34.2@92.52,121.09 92.52,118.35 92.913,117.957 v1(92.913,115.44) ; Q35.2@92.645,68.59 93.995,68.59 94.696,69.291 v1(95.877,69.291) ; v1(93,20.155) 93.259,20.155 93.51,20.406 R61.1@93.51,21.09 ; v1(93.51,142.519) 93.671,142.519 94.051,142.14 U62.7@94.862,142.14 ; v1(93.51,146.452) 93.655,146.452 94.067,146.04 U62.1@94.862,146.04 ; D47.2@94.213,127.09 94.213,126.489 94.488,126.213 v1(94.488,126) ; C127.1@94.48,59.09 94.48,58.276 94.787,57.968 v1(94.787,57.377) ; v1(94.49,17.49) R259.2@94.49,18.09 ; Q26.2@94.65,91.59 94.65,91.796 95.275,92.421 v1(95.275,92.888) 95.278,93.293 ; R269.2@95.49,21.09 95.49,21.774 95.741,22.025 v1(96.063,22.025) ; v1(95.49,26.49) R265.2@95.49,27.09 ; C242.1@96.48,87.09 96.48,86.669 96.787,86.362 v1(96.787,86.165) ; C37.2@96.52,59.09 96.52,58.287 96.85,57.957 v1(96.85,57.377) ; C77.1@97.48,90.09 97.65,90.09 Q15.2@97.65,91.59 ; R279.2@98.49,21.09 98.49,22.1 99.212,22.823 v1(99.212,23.6) ; C82.2@99.52,89.09 v1(99.52,89.68) ; v1(99.798,141.732) 102.046,141.732 102.188,141.59 Q21.2@104.65,141.59 ; v1(99.798,144.882) 100.153,144.527 104.173,144.527 104.237,144.59 Q23.2@104.65,144.59 ; v1(100,146.505) 100.299,146.505 100.55,146.254 Q22.1@100.55,145.34 ; C74.1@101.48,59.09 101.48,58.276 101.787,57.968 v1(101.787,57.377) ; v1(101.49,20.49) R270.2@101.49,21.09 ; v1(101.845,66.14) U66.7@102.862,66.14 ; C70.1@104.48,87.09 104.48,87.51 104.787,87.818 v1(104.787,88.015) ; v1(105.49,25.49) R11.2@105.49,26.09 ; R1.1@105.51,29.09 105.51,29.536 105.787,29.813 v1(105.787,30.025) ; C61.2@106.52,66.09 C217.2@106.52,68.09 ; C19.1@107.48,82.09 107.48,82.904 107.787,83.212 v1(107.787,83.803) ; v1(107.51,31.49) R10.1@107.51,32.09 ; C26.2@107.52,29.09 107.52,29.487 107.874,29.841 v1(107.874,30.015) ; v1(107.874,145.803) 107.874,145.381 108.52,144.735 C121.2@108.52,144.09 ; C219.2@108.52,146.09 108.52,147.086 ; C63.1@108.775,130.09 108.775,130.823 108.787,130.835 v1(108.787,131.18) ; C64.1@109.48,140.09 v1(109.48,140.68) ; v1(109.52,52.5) C48.2@109.52,53.09 ; v1(110.48,118.5) C113.1@110.48,119.09 ; v1(110.48,120.5) C110.1@110.48,121.09 ; R19.1@110.51,37.09 R15.2@112.49,37.09 ; v1(112.51,27.49) R6.1@112.51,28.09 ; v1(112.775,67.335) C226.1@112.775,68.09 ; C30.1@113.475,56.09 v1(113.475,57.27) ; v1(113.475,57.91) C36.1@113.475,59.09 ; C254.1@113.48,119.09 113.48,121.085 113.787,121.393 v1(113.787,123.165) ; v1(113.51,30.49) R13.1@113.51,31.09 ; R2.1@113.51,34.09 113.51,33.645 113.787,33.367 v1(113.787,33.155) ; v1(115.475,48.91) C210.1@115.475,50.09 ; v1(115.475,51.91) C206.1@115.475,53.09 ; v1(116.127,23.077) C162.2@116.127,24.257 ; v1(116.51,29.49) R5.1@116.51,30.09 ; v1(118.845,76.14) U64.7@119.862,76.14 ; v1(119.029,10.649) J10.140@119.029,11.879 ; J10.70@119.029,16.129 v1(119.029,17.359) ; J10.139@119.629,11.879 v1(119.629,13.109) ; v1(119.629,14.899) J10.69@119.629,16.129 ; v1(119.629,18.482) 119.629,18.062 120.279,17.412 J10.68@120.279,16.129 ; R247.2@120.099,107.362 120.099,107.76 120.472,108.133 v1(120.472,108.297) ; v1(120.279,10.649) J10.138@120.279,11.879 ; v1(123.225,52.335) C273.2@123.225,53.09 ; Q19.2@125.491,30.488 v1(126.071,30.488) ; v1(125.52,150.5) C27.2@125.52,151.09 ; v1(125.52,152.5) C28.2@125.52,153.09 ; v1(126.48,147.5) C234.1@126.48,148.09 ; v1(129.407,145.669) 129.917,145.669 130.388,146.14 U53.3@131.16,146.14 ; v1(130.49,41.49) R126.2@130.49,42.09 ; v1(130.52,45.5) C87.2@130.52,46.09 ; v1(131.373,156.693) 132.853,156.693 132.956,156.59 Q2.2@134.65,156.59 ; v1(131.48,143.5) C99.1@131.48,144.09 ; v1(131.48,158.5) C139.1@131.48,159.09 ; C114.1@132.48,39.09 132.48,38.669 132.787,38.362 v1(132.787,38.165) ; C221.1@132.775,60.09 132.775,56.995 132.787,56.982 v1(132.787,54.275) ; v1(134.05,159.085) C118.2@134.05,160.09 ; v1(134.225,151.335) C233.2@134.225,152.09 ; v1(138.49,151.49) R213.2@138.49,152.09 ; v1(140.945,21.59) 140.945,22.441 141.52,23.016 C119.2@141.52,24.09 ; C124.1@141.775,53.09 v1(141.775,53.845) ; U38.4@142.75,59.09 v1(143.63,59.09) ; C216.2@143.52,153.09 143.52,151.232 143.662,151.09 D36.2@143.916,151.09 ; Q38.2@143.65,62.59 v1(144.23,62.59) ; U44.4@143.95,154.09 144.043,154.09 144.043,153.772 ; C220.1@144.48,147.09 C231.1@144.48,149.09 ; v1(144.775,65.335) C277.1@144.775,66.09 ; v1(145.51,160.49) R63.1@145.51,161.09 ; R211.2@146.49,155.09 146.49,154.635 146.261,154.407 144.678,154.407 144.156,153.884 144.043,153.772 ; v1(147.48,152.5) C223.1@147.48,153.09 ; C53.1@148.48,66.09 150.39,66.09 150.95,66.65 X2.3@150.95,69.09 ; v1(149.49,154.49) R210.2@149.49,155.09 ; v1(150.845,95.015) U73.1@151.862,95.015 ; v1(151.48,78.5) C24.1@151.48,79.09 ; v1(151.845,144.14) U5.7@152.862,144.14 ; U73.10@151.862,89.165 v1(152.88,89.165) ; v1(152.195,139.14) U31.3@153.138,139.14 ; v1(152.52,136.5) C97.2@152.52,137.09 ; Q12.2@152.796,165.743 v1(153.376,165.743) ; v1(155.49,146.49) R147.2@155.49,147.09 ; v1(155.52,143.5) C68.2@155.52,144.09 ; v1(155.905,74.425) 155.905,75.404 156.225,75.723 C246.2@156.225,77.09 ; v1(156.225,137.335) C100.2@156.225,138.09 ; v1(156.49,73.49) R327.2@156.49,74.09 ; C50.1@157.48,127.09 157.48,126.67 157.787,126.362 v1(157.787,126.165) ; R113.1@157.51,68.09 157.51,68.535 157.787,68.813 v1(157.787,69.025) ; v1(158.51,166.49) R80.1@158.51,167.09 ; R209.2@159.49,67.09 159.49,65.894 159.842,65.542 v1(159.842,64.58) ; C5.2@160.52,45.09 160.863,45.09 160.985,45.212 160.985,47.288 161.138,47.44 U24.3@161.85,47.44 ; C278.1@161.48,32.09 161.519,32.09 161.519,34.09 R379.1@161.51,34.09 ; J10.73@161.529,11.879 v1(161.529,13.109) ; v1(161.529,14.899) J10.3@161.529,16.129 ; v1(161.635,166.929) 161.741,166.929 162.23,166.44 U29.3@162.85,166.44 ; v1(162.179,10.649) J10.72@162.179,11.879 ; J10.2@162.179,16.129 v1(162.179,17.359) ; J10.71@162.829,11.879 v1(162.829,13.109) ; v1(162.829,14.899) J10.1@162.829,16.129 ; v1(163.589,5.722) C158.1@163.589,6.477 ; v1(167.257,7.274) R33.2@167.257,7.874 ; v1(168.1,74.96) U4.5@168.1,76.34 ; U36.15@168.29,42.59 170.866,42.59 171.292,42.165 v1(173.005,42.165) ; v1(168.44,163.12) J5.24@168.44,164.65 ; U4.33@169.4,63.89 v1(169.4,65.27) ; v1(170.84,167.92) J5.7@170.84,169.45 ; J5.29@172.44,164.65 v1(172.44,166.18) ; v1(172.44,167.92) J5.9@172.44,169.45 ; v1(173.845,24.14) U71.7@174.862,24.14 ; v1(173.845,25.44) U71.5@174.862,25.44 ; C155.1@174.216,84.455 174.216,85.554 174.752,86.09 R223.2@175.49,86.09 ; v1(174.84,163.12) J5.32@174.84,164.65 ; U71.4@174.862,26.09 v1(175.88,26.09) ; v1(175.225,157.335) C218.2@175.225,158.09 ; U4.26@175.65,66.14 v1(177.03,66.14) ; v1(175.775,160.335) C66.1@175.775,161.09 ; v1(177.421,7.147) R218.1@177.421,7.747 ; R224.2@178.49,70.09 v1(178.49,70.69) ; v1(178.49,90.49) R77.2@178.49,91.09 ; U20.4@178.75,60.09 v1(179.63,60.09) ; v1(179.52,158.5) C98.2@179.52,159.09 ; Q7.2@179.65,160.59 v1(180.23,160.59) ; v1(181.51,126.49) R73.1@181.51,127.09 ; U49.13@182.4,79.515 183.312,79.515 183.312,78.562 183.388,78.486 183.388,78.18 182.475,77.267 C160.1@182.475,76.09 ; C129.2@182.52,133.09 182.52,134.518 183.092,135.09 C272.2@183.52,135.09 183.52,137.511 184.099,138.09 R184.2@185.49,138.09 ; v1(183.195,112.14) U17.3@184.138,112.14 ; U10.12@183.3,108.84 v1(183.3,110.37) ; U47.4@183.544,11.308 v1(185.324,11.308) ; C20.1@184.48,74.09 184.48,75.861 184.709,76.09 C166.2@185.225,76.09 ; v1(184.775,160.335) C229.1@184.775,161.09 ; v1(185.525,106.91) C14.2@185.525,108.09 ; v1(185.826,114.18) 185.826,113.391 186.525,112.692 C9.2@186.525,111.09 ; v1(186.48,71.5) C115.1@186.48,72.09 ; v1(186.48,163.5) C96.1@186.48,164.09 ; Q43.2@186.645,118.59 189.68,118.59 190.16,118.11 v1(193.027,118.11) ; v1(186.775,165.335) C222.1@186.775,166.09 ; U48.5@187.1,96.185 187.503,96.185 187.503,93.09 C78.1@187.48,93.09 ; v1(188.48,129.5) C263.1@188.48,130.09 ; v1(188.49,71.49) R314.2@188.49,72.09 ; Q27.2@188.65,35.59 v1(189.23,35.59) ; v1(188.775,115.335) C57.1@188.775,116.09 ; v1(189.48,113.5) C149.1@189.48,114.09 ; U49.12@189.6,79.515 v1(190.755,79.515) ; v1(190.12,129.44) U56.10@191.137,129.44 ; v1(190.12,130.74) U56.12@191.137,130.74 ; v1(190.48,136.5) C62.1@190.48,137.09 ; v1(190.51,134.49) R145.1@190.51,135.09 ; U56.9@191.137,128.79 v1(192.155,128.79) ; U56.13@191.137,131.39 192.239,131.39 192.49,131.139 v1(192.49,130.877) ; v1(191.52,113.5) C151.2@191.52,114.09 ; v1(192.126,28.59) 192.481,28.945 192.481,30.627 192.52,30.667 C83.2@192.52,31.09 ; U45.9@192.137,36.815 v1(193.155,36.815) ; U23.3@192.85,45.44 193.65,45.44 ; v1(193.195,51.14) U16.3@194.137,51.14 ; v1(193.51,79.49) R219.1@193.51,80.09 ; C253.2@193.52,49.09 193.52,48.606 193.7,48.426 v1(193.7,48.165) ; C56.2@193.52,55.09 v1(193.52,55.68) ; v1(195.845,128.14) U56.7@196.862,128.14 ; C31.1@197.48,46.09 197.48,45.67 197.787,45.362 197.787,45.161 v1@197.787,45.159 ; v1(197.51,51.49) R90.1@197.51,52.09 ; v1(197.79,45.161) v1@197.787,45.159 ; U45.8@197.862,36.815 v1(198.88,36.815) ; C230.1@199.48,59.09 199.48,58.67 199.787,58.362 v1(199.787,58.165) ; v1(199.49,47.49) R186.2@199.49,48.09 ; v1(199.49,50.49) R82.2@199.49,51.09 ; R83.2@199.49,124.09 199.49,123.406 199.741,123.155 v1(200,123.155) ; v1(199.52,90.5) C236.2@199.52,91.09 ; v1(199.52,92.5) C133.2@199.52,93.09 ; v1(200.16,152.87) C51.2@200.16,154.05 ; C275.2@200.52,70.09 v1(200.52,70.68) ; v1(200.52,71.5) C111.2@200.52,72.09 ; X5.3@200.533,77.851 200.533,77.365 D5.1@203.375,77.365 D5.3@204.7,77.365 ; U69.4@200.7,55.115 202.947,55.115 203.731,54.331 v1(205.265,54.331) ; v1(200.787,61.59) 200.787,60.818 201.52,60.085 C261.2@201.52,59.09 ; C42.1@201.48,38.09 201.48,36.095 201.787,35.787 v1(201.787,34.015) ; v1(201.879,81.356) 201.981,81.356 202.082,81.255 202.082,81.153 202.545,81.615 203.55,81.615 Q6.1@203.55,81.34 ; C260.1@202.48,53.09 202.48,53.904 202.787,54.212 v1(202.787,54.803) ; v1(203.48,25.5) C73.1@203.48,26.09 ; C208.1@203.48,93.09 v1(203.48,93.68) ; R91.2@203.49,56.09 203.49,55.729 203.837,55.382 ; R108.2@203.49,87.09 v1(203.49,87.69) ; C274.2@203.52,71.09 v1(203.52,71.68) ; v1(203.52,72.5) C215.2@203.52,73.09 ; v1(203.52,74.5) C212.2@203.52,75.09 ; C205.2@203.52,85.09 203.52,86.243 203.937,86.66 v1(203.937,87.59) ; 203.805,55.455 203.837,55.382 ; v1(204.48,88.5) C203.1@204.48,89.09 ; v1(204.48,90.5) C211.1@204.48,91.09 ; v1(205.475,49.91) C232.1@205.475,51.09 ; v1(205.48,61.5) C258.1@205.48,62.09 ; v1(205.51,40.945) 205.763,40.945 205.958,41.14 U40.7@206.863,41.14 ; U39.4@205.75,47.09 v1(206.63,47.09) ; U72.13@207.4,91.515 208.639,91.515 208.89,91.766 v1(208.89,92.126) ; U72.23@207.4,98.015 v1(208.555,98.015) ; v1(207.475,36.26) U75.14@208.955,36.26 ; C264.1@207.48,77.09 207.48,76.276 207.787,75.968 v1(207.787,75.377) ; C283.2@207.52,52.09 207.52,51.299 207.874,50.945 v1(207.874,50.377) ; X6.3@208.15,56.17 v1(210.43,56.17) ; C281.1@208.48,60.09 v1(208.48,61.5) ; C227.1@208.48,62.09 v1(208.48,61.5) ; v1(208.483,61.493) v1(208.48,61.5) ; v1(209.48,121.5) C241.1@209.48,122.09 ; v1(209.95,123.085) C262.1@209.95,124.09 ; v1(210.48,40.5) C125.1@210.48,41.09 ; v1(210.49,60.49) R275.2@210.49,61.09 ; Q28.2@210.65,43.59 v1(211.23,43.59) ; v1(211.225,163.335) C132.2@211.225,164.09 ; v1(211.51,46.49) R199.1@211.51,47.09 ; v1(211.845,84.14) U18.7@212.863,84.14 ; v1(212.48,144.5) C144.1@212.48,145.09 ; D41.2@213.213,41.09 213.213,40.044 213.385,39.871 v1(213.385,39.212) ; U72.12@214.6,91.515 v1(215.755,91.515) ; v1(214.775,121.335) C245.1@214.775,122.09 ; C145.1@215.48,146.09 215.48,148.479 215.787,148.786 v1(215.787,150.952) ; Q18.2@215.915,66.683 v1(216.495,66.683) ; v1(216.41,155.22) C47.2@217.59,155.22 ; v1(217.142,71.165) C268.1@217.142,71.755 ; v1(217.775,163.335) C134.1@217.775,164.09 ; v1(217.78,131.293) v1(217.785,131.303) 218.067,131.303 218.205,131.44 U68.10@219.137,131.44 ; U68.9@219.137,130.79 220.002,130.79 220.277,130.515 v1(220.49,130.515) ; U68.12@219.137,132.74 219.126,132.74 219.126,133.39 U68.13@219.137,133.39 ; v1(219.51,41.49) R271.1@219.51,42.09 ; U14.3@219.85,121.44 220.472,121.44 220.624,121.592 220.624,125.44 U15.3@220.85,125.44 ; R202.1@220.19,49.14 v1(220.79,49.14) ; v1(220.225,144.335) C131.2@220.225,145.09 ; R411.1@221.25,40.69 v1(221.85,40.69) ; v1(222.06,43.02) R408.1@222.06,43.62 ; v1(222.48,88.5) C256.1@222.48,89.09 ; v1(223.51,130.708) 223.51,130.391 223.761,130.14 U68.7@224.862,130.14 ; v1(223.52,53.5) C136.2@223.52,54.09 ; v1(223.845,131.44) U68.5@224.862,131.44 ; C135.2@224.05,52.09 v1(224.05,53.095) ; C58.1@224.48,127.09 v1(224.48,127.68) ; v1(224.48,147.5) C269.1@224.48,148.09 ; R131.1@224.51,125.09 v1(224.51,125.69) ; v1(224.55,143.51) Q4.1@224.55,144.34 ; U68.4@224.862,132.09 225.713,132.09 226.068,131.735 226.648,131.735 227.003,132.09 v1(227.003,132.877) ; D36.2@143.916,151.09 143.916,153.645 144.043,153.772 ; D36.2@143.916,151.09 143.916,150.424 144.196,150.144 ; D36.2@143.916,151.09 D36.2@144.196,151.09 ; 144.043,153.772 144.043,151.105 144.213,151.105 D36.2@144.213,151.09 D36.2@144.196,151.09 ; 144.196,150.144 D36.2@144.196,151.09 ; 144.196,150.144 144.196,149.09 C231.1@144.48,149.09 ; 144.196,150.144 144.48,149.86 C231.1@144.48,149.09 ; 193.65,45.44 194.189,45.44 194.899,44.729 197.358,44.729 ; 193.65,45.44 195.681,43.409 196.037,43.409 197.358,44.729 ; 197.358,44.729 v1@197.787,45.159 ; 203.837,55.382 v1(203.937,55.155) 203.937,55.283 203.837,55.382
IOCS16#: J11.47 R319.2 U22.25 U42.52 U61.28 U74.158 | length 312.5
  FC1 w0.15: U22.25@81.5,70.21 82.398,70.21 82.58,70.392 v1(82.58,70.616) ; v1(110.947,108.077) 110.947,107.76 111.15,107.557 U61.28@112.028,107.557 ; U74.158@161.458,25.469 164.04,25.469 v1(164.389,25.121) ; v1(182.798,147.823) J11.47@186.358,147.823 192.639,147.823 v1(192.761,147.701) ; U42.52@216.852,142.875 216.852,144.513 v1(216.992,144.653)
  FC2 w0.15: v1(77.49,105.49) 78.578,106.578 82.169,106.578 83.032,107.441 90.144,107.441 91.236,108.534 91.643,108.534 92.1,108.077 v1(110.947,108.077)
  IC1 w0.15: v1(77.49,105.49) 76.429,104.429 76.429,85.344 78.791,82.982 78.791,79.4 82.58,75.611 v1(82.58,70.616)
  IC4 w0.15: v1(110.947,108.077) 112.039,108.077 119.329,115.367 119.329,118.618 136.525,135.814 158.725,135.814 163.652,140.741 175.717,140.741 v1(182.798,147.823)
  FC4 w0.15: v1(192.761,147.701) 197.409,143.053 215.392,143.053 v1(216.992,144.653)
  BC4 w0.15: v1(82.58,70.616) 82.58,70.106 83.312,69.374 95.313,69.374 95.707,69.769 101.532,69.769 103.525,67.775 115.154,67.775 130.682,52.248 137.77,52.248 138.303,51.714 138.303,50.089 138.861,49.531 138.861,45.975 159.715,25.121 v1(164.389,25.121)
  BC1 w0.15: v1(77.49,105.49) R319.2@77.49,106.09
IOR#: R295.2 R296.1 R326.2 R364.1 U21.112 U22.42 U35.86 U56.1 U66.3 U66.5 U67.5 U72.7 U74.185 | length 347.9
  FC1 w0.15: v1(78.486,103.48) 78.486,104.09 R326.2@78.51,104.09 ; U22.42@91.2,68.66 91.2,67.753 v1(91.389,67.564) ; U74.185@161.458,38.969 v1(162.488,38.969) ; v1(185.649,117.729) 188.443,114.935 188.443,103.454 190.094,101.803 192.634,101.803 193.182,101.255 U21.112@193.182,97.754 ; U21.112@193.182,96.966 U21.112@193.182,97.754 ; v1(195.555,99.72) 194.208,98.374 193.802,98.374 U21.112@193.182,97.754 ; U35.86@200.72,37.75 v1(202.133,37.75) 202.514,38.131 202.514,47.6 201.981,48.133 199.542,48.133 199.111,48.565 199.111,54.356 196.875,56.591 196.875,74.244 199.593,76.962 199.593,84.353 199.798,84.558 U67.5@204.185,84.558 v1@205.434,84.558
  FC2 w0.15: v1(162.488,38.969) 175.661,38.969 178.612,36.018 184.657,36.018 187.07,33.606 187.733,33.606 187.858,33.731 199.669,33.731 200.711,34.773 200.711,36.328 v1(202.133,37.75)
  FC3 w0.15: v1(184.252,129.159) 185.649,127.762 v1(185.649,117.729) ; v1(195.555,99.72) 197.536,97.739 197.536,94.183 198.984,92.735 198.984,87.909 199.51,87.383
  IC4 w0.15: v1@205.434,84.558 v1(205.435,84.557) 205.435,84.558 206.656,84.558 206.832,84.734 206.832,90.018 206.959,90.145 209.017,90.145 v1(213.436,94.564)
  BC2 w0.15: v1(78.486,103.48) 76.378,101.371 76.378,83.896 80.315,79.959 81.509,79.959 81.864,79.604 81.864,75.565 90.221,67.208 91.034,67.208 v1(91.389,67.564) ; 103.868,68.74 103.886,68.758 107.086,65.557 117.17,65.557 123.8,58.928 133.579,58.928 134.391,58.115 134.391,53.823 134.925,53.289 147.345,53.289 147.866,52.768 147.866,43.853 152.242,39.478 161.055,39.478 161.564,38.969 v1(162.488,38.969)
  BC4 w0.15: v1(201.902,88.09) v1(205.435,84.557)
  BC1 w0.15: v1(91.389,67.564) 93.04,65.913 96.063,65.913 96.215,65.761 100.203,65.761 101.882,67.44 U66.5@102.862,67.44 103.654,67.44 103.88,67.666 103.88,68.492 103.632,68.74 ; U66.3@102.862,68.74 103.632,68.74 ; 103.868,68.74 103.632,68.74 ; v1(184.252,129.159) 184.252,130.09 R295.2@184.49,130.09 184.836,130.09 184.836,129.794 185.318,129.311 185.649,129.311 187.248,130.91 187.248,132.611 187.757,133.12 190.55,133.12 193.573,136.144 197.104,136.144 197.51,135.738 R296.1@197.51,134.09 197.51,132.688 U56.1@196.862,132.04 ; 199.51,87.383 R364.1@199.51,88.09 v1(201.902,88.09) ; v1(213.436,94.564) 213.637,94.765 U72.7@214.6,94.765
IOW#: R298.2 R299.2 R318.1 U21.113 U25.2 U35.89 U56.4 U67.4 U72.8 U74.186 | length 382.5
  FC1 w0.15: v1(94.488,65.075) 94.49,65.077 R318.1@94.49,66.09 ; v1(160.022,39.063) 160.225,39.063 160.631,39.469 U74.186@161.458,39.469 ; U21.113@192.682,96.966 192.682,96.014 v1(193.446,95.25) ; v1(199.339,39.25) U35.89@200.72,39.25 201.988,39.25 202.159,39.421 202.159,40.564 201.778,40.945 201.778,46.457 200.381,47.854 199.034,47.854 198.526,48.362 198.526,51.74 196.418,53.848 196.418,61.214 196.063,61.57 196.063,73.787 198.806,76.53 198.806,84.531 199.333,85.058 v1(201.225,85.058) U67.4@204.185,85.058
  FC2 w0.15: v1(94.488,65.075) 94.488,58.369 96.317,56.54 111.252,56.54 115.011,60.3 121.336,60.3 122.987,58.649 131.7,58.649 134.259,56.09 137.921,56.09 ; v1(138.506,56.09) 137.921,56.09 ; v1(160.022,39.063) 160.431,39.472 168.3,39.472 168.732,39.903 175.793,39.903 178.496,37.201 181.335,37.201 181.538,37.404 183.677,37.404 185.903,35.179 188.163,35.179 188.671,34.671 199.619,34.671 200,35.052 200,39.014 199.764,39.25 v1(199.339,39.25) ; v1(182.626,58.293) 182.626,58.273 177.413,53.059 148.444,53.059 147.751,53.752 147.751,54.466 146.922,55.295 143.123,55.295 142.717,54.89 139.121,54.89 137.921,56.09 ; 202.965,85.058 206.578,88.671 214.173,88.671 214.605,89.103 214.605,92.947 ; v1(214.605,103.886) 214.605,92.947 ; v1(216.129,94.471) v1(215.773,94.115) 214.605,92.947
  FC3 w0.15: v1(195.656,126.09) 195.072,126.674 195.072,129.337 v1(195.825,130.09)
  IC1 w0.15: v1(196.494,121.996) 202.677,121.996 204.842,119.832 205.517,119.832 216.129,109.22 v1(216.129,94.471)
  IC3 w0.15: v1(193.446,95.25) 197.206,91.491 198.73,91.491 199.136,91.084 199.136,87.147 v1(201.225,85.058)
  IC4 w0.15: v1(142.748,55.88) 144.272,54.356 144.272,52.248 145.771,50.749 148.335,50.749 v1(160.022,39.063)
  BC2 w0.15: v1(183.875,126.09) 192.401,126.09 v1(196.494,121.996) ; v1(195.656,126.09) 196.494,125.252 v1(196.494,121.996) ; v1(214.605,103.886) v1(196.494,121.996)
  BC1 w0.15: v1(138.506,56.09) U25.2@141.85,56.09 142.538,56.09 v1(142.748,55.88) ; v1(183.875,126.09) R299.2@186.49,126.09 ; v1(195.656,126.09) R298.2@196.49,126.09 ; v1(195.825,130.09) U56.4@196.862,130.09 ; U72.8@214.6,94.115 v1(215.773,94.115)
IRQ3: R115.2 U21.85 U22.35 U74.170 | length 179.8
  FC1 w0.15: U22.35@87.65,68.66 v1(87.65,70.307) ; 160.428,31.469 U74.170@161.458,31.469 ; v1(195.555,83.49) v1(195.555,83.49) U21.85@196.732,83.491
  IC1 w0.15: v1(150.876,55.296) 150.241,54.661 150.241,51.994 151.206,51.029 151.206,45.009 157.328,38.887 157.328,36.093 160.428,32.993 160.428,31.469
  IC4 w0.15: v1(152.479,56.058) 166.141,56.058 170.688,60.604 173.732,60.604 176.415,63.287 176.819,63.287 179.502,65.97 179.502,67.564 181.458,69.52 183.591,69.52 186.614,72.542 190.703,72.542 191.618,73.457 191.618,79.469 194.311,82.161 194.311,82.906 194.615,83.21 195.555,83.312 v1(195.555,83.49)
  BC4 w0.15: v1(87.65,70.307) 87.853,70.104 95.707,70.104 97.312,71.709 104.847,71.709 107.163,69.393 135.179,69.393 138.525,66.046 138.525,65.813 ; v1(150.876,55.296) 149.276,55.296 ; 138.525,65.813 138.525,65.553 148.782,55.296 149.276,55.296 ; 138.525,65.813 138.786,65.553 139.019,65.553 149.276,55.296
  BC1 w0.15: v1(150.876,55.296) 151.082,55.09 R115.2@151.49,55.09 151.511,55.09 v1(152.479,56.058)